# Altium PCB SyringeDriverHW10.PcbDoc
Units mil, origin at the board's own origin, x right, y up, seen from the top; angles counter-clockwise.
Board outline 3780 x 1713 mil, 2 copper layers (Top Layer, Bottom Layer); 55 components, 52 nets, 198 pads, 135 vias.
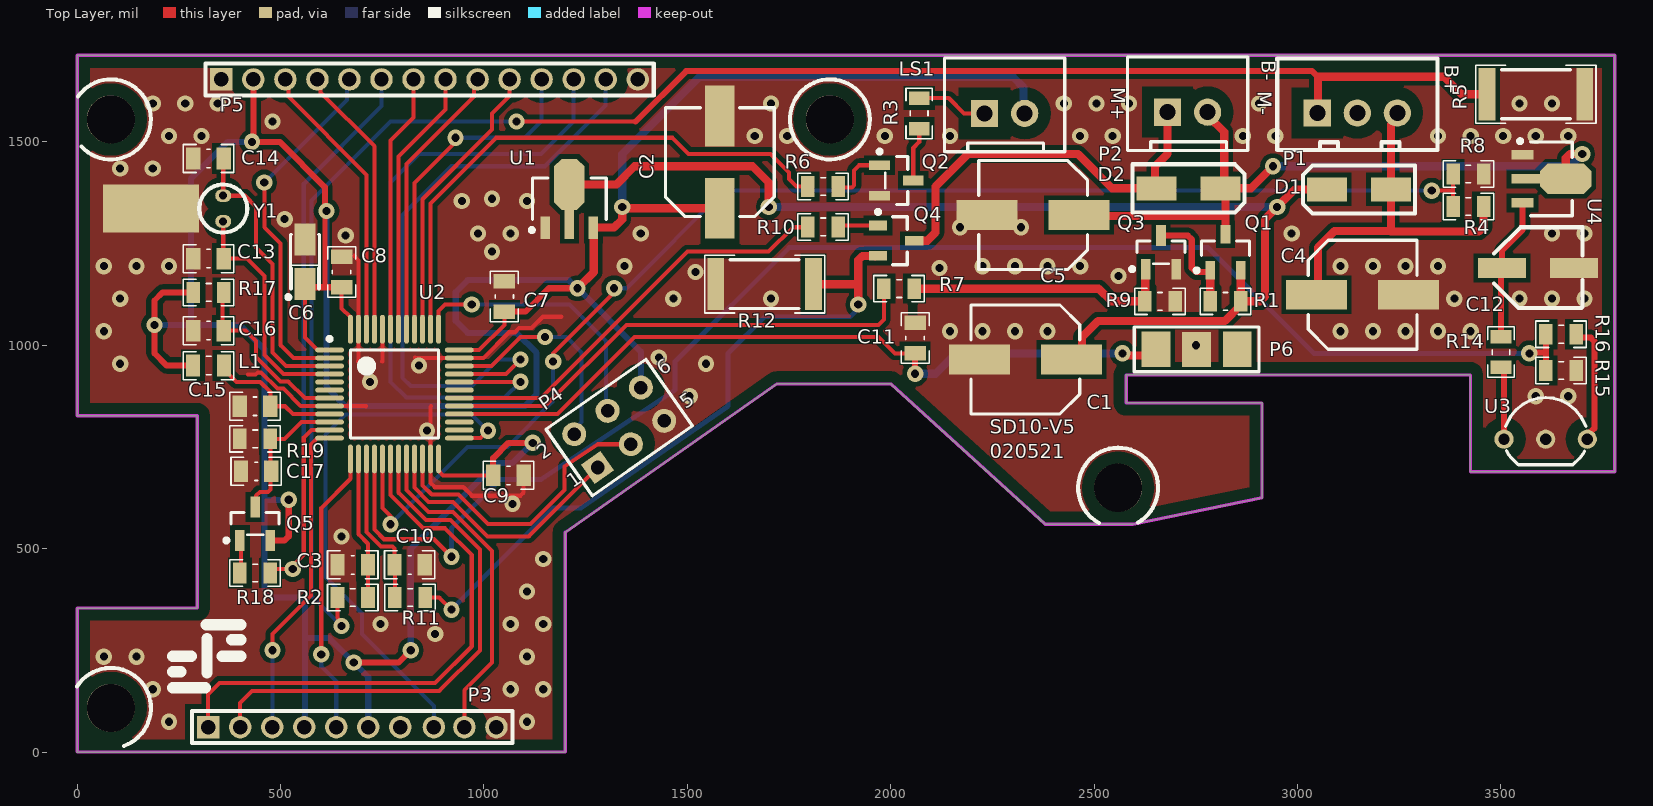
[diagram p0: Top Layer view]
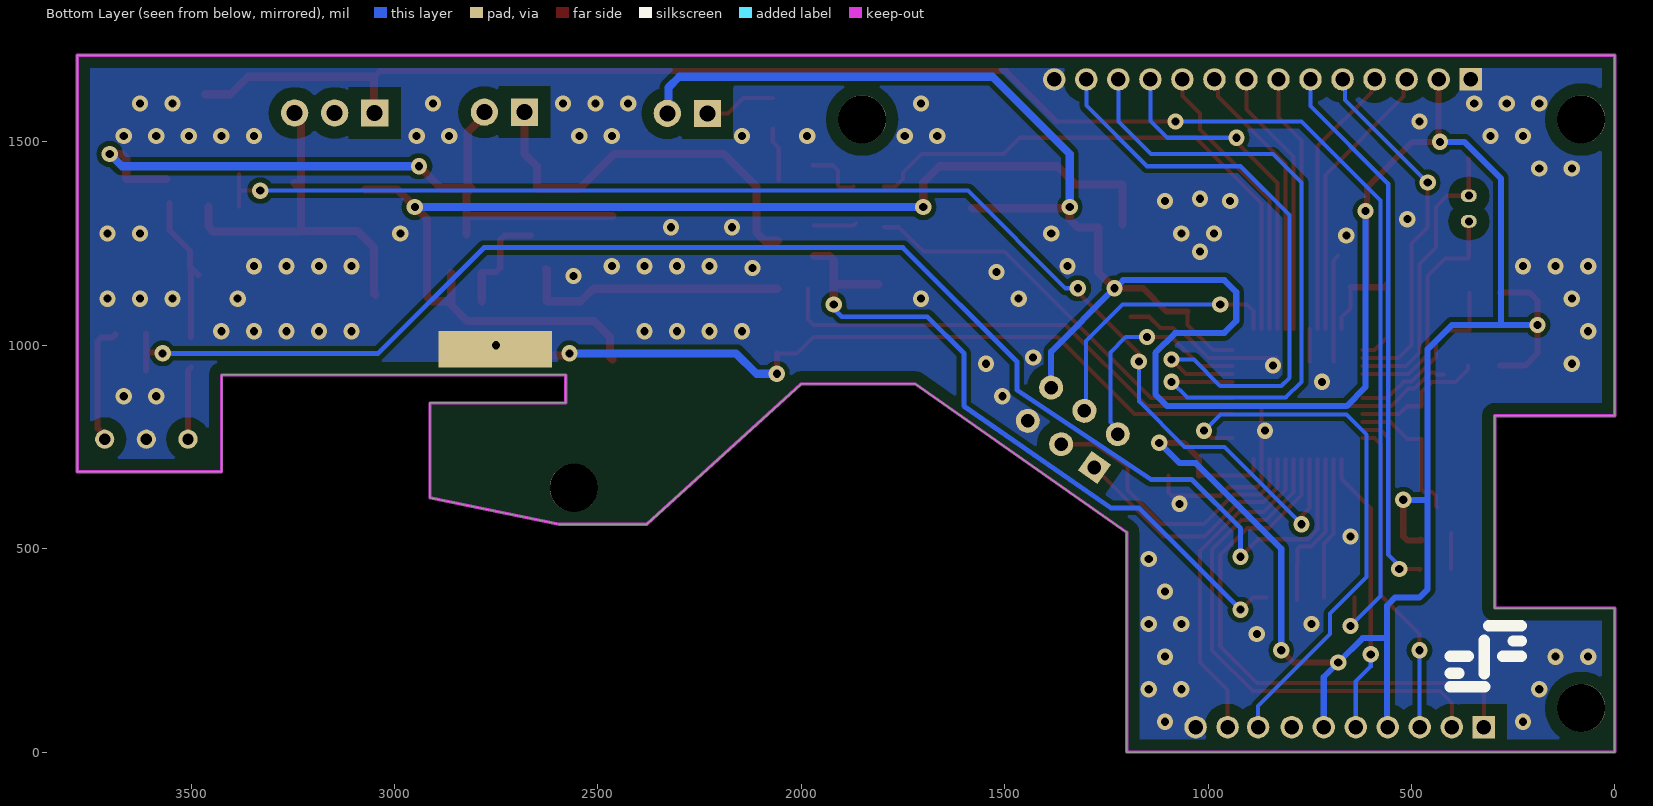
[diagram p1: Bottom Layer view, seen from below]
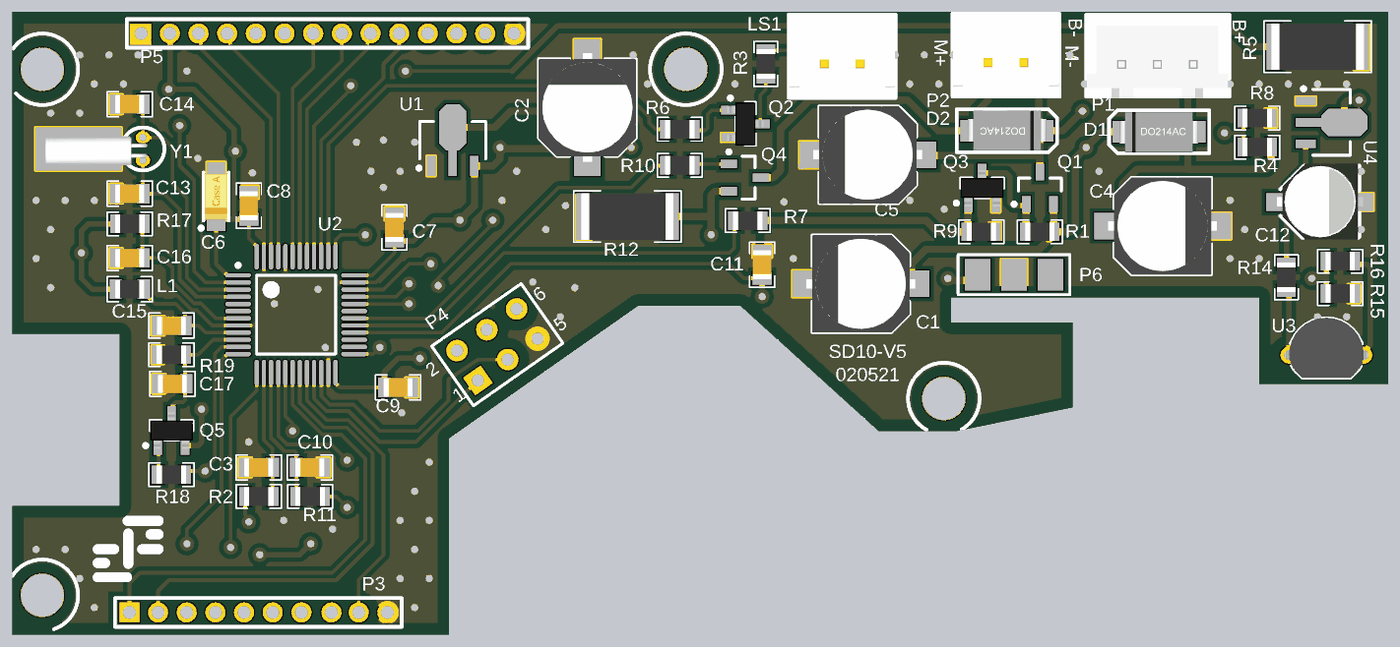
[diagram p2: 3D render of the assembled board from above, using the file's embedded part models]

## Layer stack, top to bottom
Top Solder: solder mask 0.4, Solder Resist, Dk 3.5
Top Layer: signal copper 1.4
Dielectric 1: dielectric 12.6, FR-4, Dk 4.8
Bottom Layer: signal copper 1.4
Bottom Solder: solder mask 0.4, Solder Resist, Dk 3.5

## Board outline
0,354 295.28,354 295.28,826.77 0,826.77 0,1713 3780,1713 3780,689 3425,689 3425,927.17 2579,927.17 2579,858 2913,858 2913,625 2595,560 2380,560 2000,905 1720,905 1200,540 1200,0 0,0

## Design rules (kind name [scope] priority, off if disabled: settings)
BoardOutlineClearance [All] p1: gap=31.5 ignorepadtopadclearanceinfootprint=FALSE
Clearance [All] p1: gap=12 ignorepadtopadclearanceinfootprint=TRUE except(8: Arc-Arc Arc-Track Arc-SMDPad Track-Track Track-SMDPad; 10: Arc-THPad Track-THPad THPad-THPad; 30: THPad-Fill THPad-Poly THPad-Region)
HoleSize [All] p1: absolutevalues=TRUE maxlimit=500 minlimit=1 maxpercent=80.000 minpercent=20.000
PolygonConnect [All] p1: connectstyle=Direct reliefconductorwidth=10 reliefentries=4 polygonreliefangle="90 Angle" airgapwidth=10
RoutingVias [All] p1: holewidth=20 width=40 viastyle="Through Hole" minholewidth=20 minwidth=40 maxholewidth=28 maxwidth=50
SolderMaskExpansion [All] p1: expansion=4 istentingtop=FALSE
Width [All] p1: maxlimit=20 minlimit=10 preferedwidth=10 minimp=50.000000 maximp=50.000000 favimp=50.000000
29 further rules are at their usual default settings.

## Components (designator, comment, footprint, x,y, rotation, side; value= is the part's Value field where it differs from the comment)
C1 "100uF" CAP_EL_SMD_6.3X5.4 2331,965 r180 top
C2 "100uF" CAP_EL_SMD_6.3X5.4 1580,1450 r90 top
C3 "100nF" CAP0805 677.4,460 r0 top
C4 "100uF" CAP_EL_SMD_6.3X5.4 3160,1124 r0 top
C5 "100uF" CAP_EL_SMD_6.3X5.4 2350,1320 r180 top
C6 "10uF" CAP_TANTAL_TYPE_A 465.98,1283.58 r270 top
C7 "100nF" CAP0805 1050,1120 r270 top
C8 "100nF" CAP0805 650,1180 r270 top
C9 "100nF" CAP0805 1060,680 r180 top
C10 "100nF" CAP0805 817.4,460 r180 top
C11 "100nF" CAP0805 2060,1017.4 r270 top
C12 "10uF" CAP_EL_SMD_4X5.3 3591.42,1190 r0 top
C13 "NA" CAP0805 323,1213 r0 top value=10pF
C14 "NA" CAP0805 323,1459 r0 top value=10pF
C15 "100nF" CAP0805 437.4,850 r0 top
C16 "100nF" CAP0805 323,1035.97 r0 top
C17 "100nF" CAP0805 440,690 r180 top
D1 "US1M" DO-241AC 3154,1383 r180 top
D2 "US1M" DO-241AC 2729,1386 r0 top
L1 "Ferrite Bead" IND0805 323,950 r0 top
LS1 "SPK" XH-2PIN 2280,1570 r0 top
P1 "Battery" XH-3PIN 3147,1571 r0 top
P2 "Motor Output" XH-2PIN 2729.79,1573 r0 top
P3 "Header 10" HDR_1X10-2MM 676.27,61.1 r0 top
P4 "Header 3X2" HDR2X3 1279.29,699.29 r35 top
P5 "Header 14" HDR_1X14-2MM 866.14,1653.54 r0 top
P6 "PCB SWITCH" MICROSW_VERTICAL 2752,990 r0 top
Q1 "IRLML6402" Micro3_N 2823,1228.34 r90 top
Q2 "PMBT3904" SOT23_N 2014,1405 r0 top
Q3 "PMBT3904" SOT23_N 2664.4,1228.34 r90 top
Q4 "IRLML2502" SOT-23_N 2013,1257 r0 top
Q5 "PMBT3906" SOT23_N 437.4,561.34 r90 top
R1 "100K" RES0805 2823,1108 r180 top
R2 "470K" RES0805 677.4,380 r180 top
R3 "47R" RES0805 2070,1570 r270 top
R4 "4.7M" RES0805 3420,1341 r180 top
R5 "0R500" RES2512 3586.08,1617 r180 top
R6 "10K" RES0805 1833.84,1390 r180 top
R7 "10K" RES0805 2020.6,1139 r0 top
R8 "1M" RES0805 3420,1421 r0 top
R9 "470K" RES0805 2662,1108 r0 top
R10 "10K" RES0805 1833.84,1291 r0 top
R11 "470K" RES0805 818.4,380 r0 top
R12 "0R500" RES2512 1690,1150 r0 top
R14 "100R" RES0805 3500,983 r270 top
R15 "100K" RES0805 3648,1027 r0 top
R16 "82K" RES0805 3648,938 r180 top
R17 "10K" RES0805 323,1130 r180 top
R18 "220R" RES0805 437.4,440 r180 top
R19 "10k" RES0805 437.4,770 r0 top
U1 "HT7533-3" SOT89N 1210,1360 r90 top
U2 "STM32F103C8T6" LQFP48_N 780,880 r0 top
U3 "UGN3503/AN503" "TO-92 BENT" 3610,769 r0 top
U4 "HT7550-2" SOT89N 3624,1409 r0 top
Y1 "NA" CRYSTAL_NC308-RA 359,1336 r270 top value=32.768kHz

## Footprints (in the part's own frame and the unit in brackets; to place one, negate y for a bottom-side part, rotate by r counter-clockwise, add the part's x,y. Pads: shape width x height; smd on the part's side, far side on the other; paste and mask are expansions set on the pad)
CAP0805 [mm] "Chip Capacitor, 2-Leads, Body 2/00x1/25mm, IPC Medium Density DESIGNER:ABBAS BASEREH"
  rect 0.9x1.35 smd: 1(-0.95,0) 2(0.95,0)
  silkscreen extent -1.58,-0.87 1.58,0.88, body extent -1.03,-0.65 1.02,0.65, height 0.5
CAP_EL_SMD_4X5.3 [mm]
  rect 3x1.25 smd: 1(-2.25,0) 2(2.25,0)
  silkscreen extent -2.74,-2.49 2.77,2.54, body extent -2.96,-2.62 3.04,2.68, height 6.42
CAP_EL_SMD_6.3X5.4 [mm] "Aluminum Electrolytic Capacitor, Body 6.60x6.60x5.80mm, IPC Low Density"
  rect 3.8x1.85 smd: 1(-2.875,0) 2(2.875,0)
  silkscreen extent -3.4,-3.4 3.4,3.4, body extent -3.8,-3.4 3.8,3.4, height 6.36
CAP_TANTAL_TYPE_A [mm]
  rect 2x1.3 smd: 1(3.393,2.388) 2(0.593,2.388)
  silkscreen extent 0.29,1.22 4.32,3.29, body extent 0.41,1.59 3.61,3.19, height 1.6
CRYSTAL_NC308-RA [mm] "32.768khz N308 Right angle"
  oval 0.8x1 hole 0.5: 1(0.8,0) 2(-0.8,0)
  rect 3x6 smd: 3(0,-4.5)
  silkscreen extent -1.5,-1.5 1.5,1.5, body extent -0.87,-6.81 1.13,0.33, height 2.2
DO-241AC [mm]
  rect 2.5x1.5 smd: 1(-1.918,-0.005) 2(2.082,-0.005)
  silkscreen extent -3.42,-1.5 3.58,1.5, body extent -2.64,-1.37 2.84,1.42, height 2.39
HDR2X3 [mm] "Connector; Header; 3x2 Position"
  rect 1.5x1.5 hole 0.85: 1(0,0)
  round 1.5 hole 0.85: 2(0,2.54) 3(2.54,0) 4(2.54,2.54) 5(5.08,0) 6(5.08,2.54)
  silkscreen extent -1.27,-1.27 6.35,3.81
HDR_1X10-2MM [mm]
  rect 1.4x1.4 hole 0.9: 1(-9,0)
  round 1.4 hole 0.9: 2(-7,0) 3(-5,0) 4(-3,0) 5(-1,0) 6(1,0) 7(3,0) 8(5.097,0) 9(7,0)
  round 1.4 hole 0.9 mask+0.102: 10(9,0)
  silkscreen extent -10,-1 10,1
HDR_1X14-2MM [mm]
  rect 1.4x1.4 hole 0.9: 1(-13,0)
  round 1.4 hole 0.9: 2(-11,0) 3(-9,0) 4(-7,0) 5(-5,0) 6(-3,0) 7(-1,0) 8(1,0) 9(3,0) 10(5,0) 11(7,0) 12(9,0) 13(11,0) 14(13,0)
  silkscreen extent -14,-1 14,1
IND0805 [mm] "Chip Inductor, 2-Leads, Body 2/00x1/25mm, IPC Medium Density DESIGNER:ABBAS BASEREH"
  rect 0.87x1.37 smd: 1(-0.97,0) 2(0.97,0)
  silkscreen extent -1.57,-0.87 1.58,0.87, body extent -1.02,-0.65 1.03,0.65, height 0.5
LQFP48_N [mm] "Thin QFP, 48-Leads, Body 7x7mm, Pitch 0.5mm, IPC Medium Density"
  oval 1.8x0.3 smd: 1(-4.05,2.75) 2(-4.05,2.25) 3(-4.05,1.75) 4(-4.05,1.25) 5(-4.05,0.75) 6(-4.05,0.25) 7(-4.05,-0.25) 8(-4.05,-0.75) 9(-4.05,-1.25) 10(-4.05,-1.75) 11(-4.05,-2.25) 12(-4.05,-2.75) 25(4.05,-2.75) 26(4.05,-2.25) 27(4.05,-1.75) 28(4.05,-1.25) 29(4.05,-0.75) 30(4.05,-0.25) 31(4.05,0.25) 32(4.05,0.75) 33(4.05,1.25) 34(4.05,1.75) 35(4.05,2.25) 36(4.05,2.75)
  oval 0.3x1.8 smd: 13(-2.75,-4.05) 14(-2.25,-4.05) 15(-1.75,-4.05) 16(-1.25,-4.05) 17(-0.75,-4.05) 18(-0.25,-4.05) 19(0.25,-4.05) 20(0.75,-4.05) 21(1.25,-4.05) 22(1.75,-4.05) 23(2.25,-4.05) 24(2.75,-4.05) 37(2.75,4.05) 38(2.25,4.05) 39(1.75,4.05) 40(1.25,4.05) 41(0.75,4.05) 42(0.25,4.05) 43(-0.25,4.05) 44(-0.75,4.05) 45(-1.25,4.05) 46(-1.75,4.05) 47(-2.25,4.05) 48(-2.75,4.05)
  silkscreen extent -4.17,-2.75 2.75,3.57, body extent -3.5,-3.5 3.5,3.5, height 1.6
Micro3_N [mm] "SOT23, 3-Leads, Body 2.9x1.3mm, Pitch 0.95mm, Lead Span 2.3mm, IPC Medium Density"
  rect 1.15x0.6 smd: 1(-1.125,0.95) 2(-1.125,-0.95) 3(1.125,0)
  silkscreen extent -1.25,-1.5 0.7,1.92, body extent -0.7,-1.5 0.7,1.5, height 1.12
MICROSW_VERTICAL [mm] "Vertical micro switch"
  rect 1.8x2.2 smd: 1(2.54,0) 2(0,-0.007) 3(-2.54,0)
  rect 7.1x2.3 smd far side: 4(0,0)
  silkscreen extent -3.9,-1.4 3.9,1.4
RES0805 [mm] "Chip Resistor, 2-Leads, Body 2/00x1/25mm, IPC Medium Density DESIGNER:ABBAS BASEREH"
  rect 0.85x1.3 smd: 1(-0.95,0) 2(0.95,0)
  silkscreen extent -1.58,-0.82 1.58,0.82, body extent -1.02,-0.65 1.02,0.65, height 0.5
RES2512 [mm] "Chip Resistor, 2-Leads, Body 6/40x3/20mm, IPC Medium Density DESIGNER:ABBAS BASEREH"
  rect 1.05x3.25 smd: 1(-3.05,0) 2(3.05,0)
  silkscreen extent -3.75,-1.8 3.75,1.8, body extent -3.22,-1.63 3.22,1.63, height 0.7
SOT23_N [mm] "SOT23, 3-Leads, Body 2.9x1.3mm, Pitch 0.95mm, Lead Span 2.3mm, IPC Medium Density"
  rect 1.3x0.6 smd: 1(-1.05,0.95) 2(-1.05,-0.95) 3(1.05,0)
  silkscreen extent -1.17,-1.5 0.7,1.92, body extent -1.27,-1.5 1.27,1.5, height 1.1
SOT89N [mm] "SOT89, 3-Leads, Body 4.5x2.4 mm, Pitch 1.5mm, Lead Span 4.1mm, IPC Medium Density"
  rect 1.4x0.6 smd: 1(-1.8,1.5) 3(-1.8,-1.5)
  rect 1.8x0.6 smd: 2(-1.6,0)
  oct 3.2x1.9 smd: 2(0.9,0)
  silkscreen extent -2.07,-2.3 1.3,2.47, body extent -1.3,-2.3 1.3,2.3, height 1.6
SOT-23_N [mm] "SOT23, 3-Leads, Body 2.9x1.3mm, Pitch 0.95mm, Lead Span 2.3mm, IPC Medium Density"
  rect 1.15x0.6 smd: 1(-1.125,0.95) 2(-1.125,-0.95) 3(1.125,0)
  silkscreen extent -1.25,-1.5 0.7,1.92, body extent -0.7,-1.5 0.7,1.5, height 1.11
"TO-92 BENT" [mm] "DESIGNER :ABBAS BASEREH"
  round 1.2 hole 0.7: 1(-2.6,0) 2(0,0) 3(2.6,0)
  silkscreen extent -2.51,-1.6 2.51,2.6, body extent -2.79,-1.59 2.79,2.61, height 10
XH-2PIN [mm]
  rect 1.7x1.7 hole 1: 1(-1.25,0)
  round 1.7 hole 1: 2(1.25,0)
  silkscreen extent -3.75,-2.4 3.75,3.45, body extent -3.7,-2.35 3.7,3.4, height 7
XH-3PIN [mm]
  rect 1.7x1.7 hole 1: 1(-2.5,0)
  round 1.7 hole 1: 2(0,0) 3(2.5,0)
  silkscreen extent -5,-2.31 5,3.4, body extent -4.98,-2.42 4.92,3.33, height 7

## Part data
C1 C4 C5: library part Cap2, "Electrolyte 16V", PackageDescription="Capacitor; 2 Leads", PackageReference=CAPR5-4X5, Published=23-Sep-2002, Publisher="Altium Limited"
C2: library part Cap2, "Electrolyte  16V", PackageDescription="Capacitor; 2 Leads", PackageReference=CAPR5-4X5, Published=23-Sep-2002, Publisher="Altium Limited"
C3 C7 C8 C9 C10 C11 C13 C14 C15 C16 C17: library part Cap, "Capacitor", LatestRevisionDate=17-Jul-2002, LatestRevisionNote="Re-released for DXP Platform.", PackageDescription="Radial Cap, Thru-Hole; 2 Leads; 0.3 in Pin Spacing", PackageReference=RAD-0.3, Published=8-Jun-2000, Publisher="Altium Limited"
C6: library part Cap2, "tantal 10V", PackageDescription="Capacitor; 2 Leads", PackageReference=CAPR5-4X5, Published=23-Sep-2002, Publisher="Altium Limited"
C12: library part Cap2, "Electrolyte 10V", PackageDescription="Capacitor; 2 Leads", PackageReference=CAPR5-4X5, Published=23-Sep-2002, Publisher="Altium Limited"
D1 D2: library part "Diode 1N4001", "1 Amp General Purpose Rectifier", Code_JEDEC=DO-204-AL, ComponentLink1Description="Manufacturer Link", ComponentLink1URL=http://www.fairchildsemi.com/, ComponentLink2Description=Datasheet, ComponentLink2URL=http://www.fairchildsemi.com/ds/1N%2F1N4001.pdf, DatasheetVersion=1998, LatestRevisionDate=17-Jul-2002, LatestRevisionNote="Re-released for DXP Platform.", PackageDescription="Diode, Axial; Body 5.2 x 2.7 mm (LxDia. max), Lead Dia. 0.86 mm (max)", PackageReference=DO-41, PackageVersion=Aug-1999, Published=8-Jun-2000, Publisher="Altium Limited"
L1: library part Inductor, Code_IEC=1005, Code_JEITA=0402, LatestRevisionDate=29-May-2009, LatestRevisionNote="IPC-7351 Footprint Added.", PackageDescription="Chip Inductor", PackageReference=0402-A, Published=8-Jun-2000, Publisher="Altium Limited"
LS1: library part Buzzer, "Magnetic Transducer Buzzer", ComponentLink1Description="Manufacturer Link", ComponentLink1URL=http://www.megastar.com/linecard/buzzmode/index.php, DatasheetVersion=17-Dec-2003, LatestRevisionDate=17-Dec-2003, LatestRevisionNote="Schematic revised, PCB Footprint replaced.", PackageDescription="Magnetic Transducer Buzzer", PackageReference=ABSM-1574, Published=24-Mar-1999, Publisher="Altium Limited"
P1: library part "Header 3", "Header, 3-Pin", LatestRevisionDate=17-Jul-2002, LatestRevisionNote="Re-released for DXP Platform.", Publisher="Altium Limited"
P2: library part "Header 2", "Header, 2-Pin", LatestRevisionDate=17-Jul-2002, LatestRevisionNote="Re-released for DXP Platform.", Publisher="Altium Limited"
P3: "Header, 10-Pin", LatestRevisionDate=17-Jul-2002, LatestRevisionNote="Re-released for DXP Platform.", Publisher="Altium Limited"
P4: "Header, 3-Pin, Dual row", LatestRevisionDate=17-Jul-2002, LatestRevisionNote="Re-released for DXP Platform.", Publisher="Altium Limited"
P5: "Header, 14-Pin", LatestRevisionDate=17-Jul-2002, LatestRevisionNote="Re-released for DXP Platform.", Publisher="Altium Limited"
P6: library part "Header 4", "Header, 4-Pin", LatestRevisionDate=17-Jul-2002, LatestRevisionNote="Re-released for DXP Platform.", Publisher="Altium Limited"
Q1: library part IRLML6401, "HEXFET Power MOSFET", ComponentLink1Description="Manufacturer Link", ComponentLink1URL=http://www.irf.com/, ComponentLink2Description=Datasheet, ComponentLink2URL=http://www.irf.com/product-info/datasheets/data/IRLML6401.pdf, DatasheetVersion=2-Jul-2001, PackageDescription="3-Pin SOT-23 Package 0.95 mm Pitch, 2.3 mm Lead Span", PackageReference=Micro3, PackageVersion=Jul-2001, Published=17-Sep-2003, Publisher="Altium Limited"
Q2 Q3: "NPN Switching Transistor", ComponentLink1Description="Manufacturer Link", ComponentLink1URL=http://www.semiconductors.philips.com/, ComponentLink2Description=Datasheet, ComponentLink2URL=http://www.semiconductors.philips.com/acrobat/datasheets/PMBT3904_4.pdf, DatasheetVersion=27-Apr-1999, LatestRevisionDate=12-Dec-2006, LatestRevisionNote="IPC-7351 Footprint Added.", PackageDescription="3-Pin SOT-23 Package 0.95 mm Pitch, 2.3 mm Lead Span", PackageReference=SOT23, PackageVersion=May-1999, Published=17-Sep-2003, Publisher="Altium Limited"
Q4: library part IRLML2402, "HEXFET Power MOSFET", ComponentLink1Description="Manufacturer Link", ComponentLink1URL=http://www.irf.com/, ComponentLink2Description=Datasheet, ComponentLink2URL=http://www.irf.com/product-info/datasheets/data/irlml2402.pdf, DatasheetVersion=Aug-1997, LatestRevisionDate=20-Nov-2009, LatestRevisionNote="IPC-7351 Footprint Added.", PackageDescription="3-Pin SOT-23 Package 0.95 mm Pitch, 2.3 mm Lead Span", PackageReference=SOT-23, Published=8-Jun-2000, Publisher="Altium Limited"
Q5: "PNP Switching Transistor", ComponentLink1Description="Manufacturer Link", ComponentLink1URL=http://www.semiconductors.philips.com/, ComponentLink2Description=Datasheet, ComponentLink2URL=http://www.semiconductors.philips.com/acrobat/datasheets/PMBT3906_4.pdf, DatasheetVersion=27-Apr-1999, LatestRevisionDate=12-Dec-2006, LatestRevisionNote="IPC-7351 Footprint Added.", PackageDescription="3-Pin SOT-23 Package 0.95 mm Pitch, 2.3 mm Lead Span", PackageReference=SOT23, PackageVersion=May-1999, Published=17-Sep-2003, Publisher="Altium Limited"
R1 R2 R3 R4 R5 R6 R7 R8 R9 R10 R11 R12 R14 R15 R16 R17 R18 R19: library part Res1, "Resistor", LatestRevisionDate=17-Jul-2002, LatestRevisionNote="Re-released for DXP Platform.", PackageDescription="Axial Device, Thru-Hole; 2 Leads; 0.3 in Pin Spacing", PackageReference=AXIAL-0.3, Published=8-Jun-2000, Publisher="Altium Limited"
U1: library part HT7530-1, "3.0V 100mA Low Power,  Low Dropout Voltage (LDO) Regulator", Code_IPC=SOT89, ComponentLink1Description="Manufacturer Link", ComponentLink1URL=http://www.holtek.com/, ComponentLink2Description=Datasheet, ComponentLink2URL=http://www.holtek.com/pdf/consumer/75xx_1v150.pdf, DatasheetVersion="rev1.50, Jan-2006", PackageDescription="3-Pin SOT-89 Package 1.5 mm Pitch, 4.1 mm Lead Span", PackageReference=SOT-89, PackageVersion=Jan-2006, Published=30-Mar-2007, Publisher="Altium Limited"
U2: "STM32 ARM-based 32-bit MCU with 64 Kbytes Flash, 48-pin LQFP, Industrial Temperature", ComponentLink1Description="Manufacturer Link", ComponentLink1URL=www.st.com/stm32, ComponentLink2Description=Datasheet, ComponentLink2URL=http://www.st.com/stonline/products/literature/ds/13587.pdf, DatasheetVersion="rev6, Mar-2008", PackageDescription="48-Pin Low-Profile Quad Flat Pack, 7 x 7 mm Body, 0.5 mm Pitch (LQFP48)", PackageReference=LQFP48, PackageVersion=Mar-2008, Published=30-May-2008, Publisher="Altium Limited"
U3: library part UGN3503, "RATIOMETRIC, LINEAR / HALL-EFFECT SENSORS"
U4: library part HT7530-1, "5.0V 100mA Low Power,  Low Dropout Voltage (LDO) Regulator", Code_IPC=SOT89, ComponentLink1Description="Manufacturer Link", ComponentLink1URL=http://www.holtek.com/, ComponentLink2Description=Datasheet, ComponentLink2URL=http://www.holtek.com/pdf/consumer/75xx_1v150.pdf, DatasheetVersion="rev1.50, Jan-2006", PackageDescription="3-Pin SOT-89 Package 1.5 mm Pitch, 4.1 mm Lead Span", PackageReference=SOT-89, PackageVersion=Jan-2006, Published=30-Mar-2007, Publisher="Altium Limited"
Y1: library part XTAL_Crystal_G, "XTAL Crystal", ComponentLink1Description=Datasheet, ComponentLink2Description=Reference, Design Date=2017-1-3, Designer="ABBAS BASEREH", Mounting Technology="Surface Mount\Through-Hole", Status=Unreleased

## Free pads (board coordinates)
  round 118.11 hole 118.11: ""(82.68,108.27) ""(82.68,1555.12) ""(1850.39,1555.12) ""(2559.06,649.61)

## Via types
v1: diameter 40, hole 20, Top Layer to Bottom Layer, tented both sides, 135 vias

## Nets (pads, with @x,y where several pads share a name; then routed paths per layer and width w, separated by ;. In a path a pad name is that pad's centre, name@x,y a point inside that pad or via, vN(x,y) a via of type N, cw(c..) or ccw(c..) an arc to the next point about the centre after c; other vN are vias at no path point)
+3V3: C2.1 C6.1 C7.2 C8.2 C9.2 L1.1 LS1.2 P3.4 P3.6 P4.6 P5.2 Q5.2 R17.2 U1.3 U2.1 U2.24 U2.36 U2.48 | length 9043.2
  Top Layer w10: C6.1 560,1019.29 591.02,988.27 U2.1 ; C8.2 650,1090.71 671.73,1068.98 U2.48 ; U2.24 888.27,691.51 899.78,680 C9.2 ; U2.36 988.27,988.27 1050,1050 C7.2
  Top Layer w12: 608.93,1143.67 v1@608.93,1330
  Top Layer w15: L1.1@281.81,950 220,950 190,980 v1(190,1050) 190,1110 210,1130 R17.2@282.6,1130 ; P5.2 433.07,1503.07 v1(430,1500) 497.85,1500 608.93,1388.93 608.93,1334.07 v1(613,1330) ; Q5.2@477.4,522.6 Q5.2 510,520 520,530 v1(520,620) ; C6.1 567.4,1142.6 610,1142.6 ; 608.93,1143.67 610,1142.6 ; C8.2 610,1142.6 ; v1(680,220) 790,220 v1(820,250) ; C9.2 1022.6,722.6 1060,760 v1(1120,760) ; C7.2 1102.09,1082.6 1159.49,1140 v1(1230,1140)
  Top Layer w20: v1(1230,1140) 1270,1180 1270,1288.19 U1.3 1320,1289.13 1340,1309.13 v1(1340,1340) ; v1@1350,1336.81 C2.1
  Bottom Layer w15: v1(190,1050) 280,1050 ; v1(430,1500) 370,1500 280,1410 280,1050 ; v1(520,620) 460,620 ; P3.4 560,62.94 560,280 ; v1(613,1330) 613,897 659.5,850.5 1100.5,850.5 1129.5,879.5 1129.5,981.36 1080.86,1030 960,1030 960,1030.5 930.5,1060 930.5,1130.5 960,1160 1208.71,1160 1228.71,1140 v1(1230,1140) 1385.76,984.24 P4.6 ; P3.6 715.63,184.37 v1(680,220) 620,280 560,280 ; v1(820,250) 820,500 1030,710 1070,710 v1(1120,760) ; 280,1050 400,1050 460,990 460,620 ; 460,620 460,400 480,380 540,380 560,360 560,280
  Bottom Layer w20: v1(1340,1340) 1340,1470 1530,1660 2300,1660 2326.54,1633.46 2326.54,1572.68 LS1.2 LS1.2@2326.54,1567.32
+5V: C12.1 R14.1 U4.3 | length 379.8
  Top Layer w15: C12.1@3482.42,1172.89 C12.1@3502.42,1192.89 ; R14.1 3500,1187.17 C12.1 3502.83,1232.83 3553.13,1283.13 U4.3
BAT+: C4.1 D1.1 P1.3 R4.1 | length 915.5
  Top Layer w20: C4.1 3050,1127.19 3050,1240 3090.5,1280.5 3229.5,1280.5 ; D1.1@3245.43,1399.11 D1.1 ; P1.3 3245.43,1558.3 3229.5,1542.37 D1.1 ; R4.1 3457.4,1291.72 3445.69,1280 3230,1280 3229.5,1280.5 ; 3229.5,1280.5 D1.1
BAT-: P1.1 R2.2 R5.2 | length 4285.7
  Top Layer w10: R2.2 640,330 650,320 v1(650,310) ; v1(1080,1550) 1373,1550
  Top Layer w15: 1373,1550 1497,1674 3036,1674 3050,1660
  Top Layer w20: P1.1 3050,1572.43 3050,1660 3360,1660 3403,1617 R5.2
  Bottom Layer w10: v1(650,310) 576,384 576,1356 770,1550 v1(1080,1550)
BAT_CUR: C3.2 R2.1 U2.14 | length 350.2
  Top Layer w10: U2.14 691.42,535.35 714.8,511.96 C3.2 R2.1
BAT_VOLT: R4.2 R8.1 U2.17 | length 3273.1
  Top Layer w10: U2.17 750.47,599.53 770,580 v1(770,560) ; v1(1170,960) 1170,980 1320,1130 v1(1320,1140) ; v1(3330,1380) 3380,1380 ; R4.2 R8.1
  Bottom Layer w10: v1(770,560) 960,750 1057.67,750 1170,862.33 v1(1170,960) ; v1(1320,1140) 1350,1140 1590,1380 v1(3330,1380)
BUZZER: R6.2 U2.38 | length 1362.9
  Top Layer w10: U2.38 868.58,1348.58 950,1430 1030,1510 1463,1510 1503,1470 1704.11,1470 1750,1424.11 1750,1408.22 1768.22,1390 R6.2
GND: C1.2 C2.2 C3.1 C4.2 C5.2 C6.2 C7.1 C8.1 C9.1 C10.1 C11.1 C12.2 C13.1 C14.1 C15.1 C16.1 C17.2 P3.10 P4.5 P5.1 P5.14 P6.2 P6.4 Q2.2 Q3.2 R5.1 R8.2 R9.2 R12.1 R16.1 R19.1 U1.1 U2.8 U2.23 U2.35 U2.44 U2.47 U3.2 U4.1 Y1.3 | length 1550.9
  Top Layer w10: 420,928 438.73,928 443.95,933.22 452.23,933.22 492.24,893.21 506.79,893.21 549.53,850.47 U2.8 709.53,850.47 710,850 ; 680,1220 691.42,1208.58 U2.47 691.42,961.42 690,960 ; 750,960 750.47,960.47 U2.44 ; 830,970 831.42,968.58 U2.35 998.58,968.58 1061.88,1031.88 1076.43,1031.88 1086.64,1042.1 1117.1,1042.1 1145,1070 1190,1070 ; 870,850 868.58,848.58 U2.23 868.58,661.42 879.06,650.94 949.06,650.94 970,630 1090,630 1097.4,637.4 C9.1
  other v1: 225.57,74.43 1105.57,74.43 185.57,154.43 1065.57,154.43 1145.57,154.43 65.57,234.43 145.57,234.43 1105.57,234.43 880,290 745.57,314.43 1065.57,314.43 1145.57,314.43 1105.57,394.43 1145.57,474.43 650,530 1070,610 860,790 1505.57,874.43 3585.57,874.43 3665.57,874.43 720,910 840,950 105.57,954.43 1545.57,954.43 1430,970 2750,1000 65.57,1034.43 2145.57,1034.43 2225.57,1034.43 2305.57,1034.43 2385.57,1034.43 3105.57,1034.43 3185.57,1034.43 3265.57,1034.43 3345.57,1034.43 3425.57,1034.43 105.57,1114.43 1465.57,1114.43 1705.57,1114.43 3385.57,1114.43 3545.57,1114.43 3625.57,1114.43 3705.57,1114.43 2560,1170 1520,1180 2120,1190 65.57,1194.43 145.57,1194.43 225.57,1194.43 1345.57,1194.43 2225.57,1194.43 2305.57,1194.43 2385.57,1194.43 2465.57,1194.43 3105.57,1194.43 3185.57,1194.43 3265.57,1194.43 3345.57,1194.43 1020,1230 660,1270 985.57,1274.43 1065.57,1274.43 1385.57,1274.43 2985.57,1274.43 3625.57,1274.43 3705.57,1274.43 2170,1290 2320,1290 510,1310 945.57,1354.43 1105.57,1354.43 1020,1360 105.57,1434.43 185.57,1434.43 225.57,1514.43 305.57,1514.43 1665.57,1514.43 1745.57,1514.43 1985.57,1514.43 2145.57,1514.43 2465.57,1514.43 2545.57,1514.43 2865.57,1514.43 2945.57,1514.43 3345.57,1514.43 3425.57,1514.43 3505.57,1514.43 3585.57,1514.43 3665.57,1514.43 480,1550 185.57,1594.43 265.57,1594.43 345.57,1594.43 1705.57,1594.43 2425.57,1594.43 2505.57,1594.43 2585.57,1594.43 2905.57,1594.43 3545.57,1594.43 3625.57,1594.43
KEY_Power: P5.6 R18.1 U2.11 | length 1786.5
  Top Layer w10: U2.11 575.6,791.42 557,772.82 557,485.12 530,458.12 v1(530,450) v1@510,450 ; v1@510,450 477.4,450 480,447.4 482.6,450 v1@510,450
  Bottom Layer w10: v1(530,450) 530,458.12 557,485.12 557,1397 748,1588 P5.6
KEY_PowerR: C17.1 Q5.3 R19.2 U2.10 | length 357.1
  Top Layer w10: Q5.3 440,605.28 440,630 449.34,639.34 468.95,639.34 474.8,645.2 R19.2 510,770 551.1,811.1 U2.10
KEY_StartStop: P5.5 U2.2 | length 890.4
  Top Layer w10: v1(460,1400) 460,1290 500,1250 500,1000 531.42,968.58 U2.2
  Bottom Layer w10: v1(460,1400) 662.87,1602.87 662.87,1647.12 P5.5
KEY_SyringeType: P5.3 U2.46 | length 696.6
  Top Layer w10: P5.3 519.02,1646.34 519.02,1610.98 711.1,1418.9 U2.46
KEY_Time: P5.4 U2.45 | length 672.2
  Top Layer w10: P5.4 598.6,1645.5 598.6,1621.4 730.79,1489.21 U2.45
LED_ALARM: P5.12 U2.32 | length 1608.9
  Top Layer w10: U2.32 1089.53,909.53 v1(1090,910)
  Bottom Layer w10: v1(1090,910) 1051,871 809,871 770,910 770,1400 840,1470 1140,1470 1220.47,1550.47 P5.12
LED_BAT: P3.8 U2.25 | length 1344.9
  Top Layer w10: U2.25 991.73,771.73 v1(1010,790)
  Bottom Layer w10: P3.8 876.93,113.07 700,290 700,340 610,430 610,780 660,830 969.14,830 1009.14,790 v1(1010,790)
LED_SS: P5.13 U2.33 | length 1563.6
  Top Layer w10: U2.33 1053.96,929.21 1084.75,960 v1@1090,960
  Bottom Layer w10: v1(1090,965) 1035,965 970,900 820,900 800,920 800,1320 920,1440 1150,1440 1299.21,1589.21 P5.13
M+: D2.1 P2.1 Q4.3 | length 979.8
  Top Layer w20: Q4.3 2090,1257 2110,1277 2110,1390 2190,1470 2460,1470 2544.18,1385.82 2646.5,1385.82 2650,1389.32 2650,1440 2680.57,1470.57 P2.1
M-: C5.1 D2.2 P2.2 Q1.3 U4.2 | length 1792.4
  Top Layer w20: C5.1@2464.19,1318 2815,1318 ; P2.2 2779,1565.25 2820,1524.25 2820,1394.83 2823,1391.83 D2.2@2823,1385.82 ; Q1.3 2823,1373.8 D2.2 D2.2@2823,1385.82 ; v1(2940,1440) 2885.82,1385.82 D2.2@2823,1385.82 ; U4.2@3561.01,1409 3659.43,1409 3659.43,1460 3669.43,1470 v1(3700,1470)
  Bottom Layer w20: v1(2940,1440) 3670,1440 v1(3700,1470)
MOT_CUR: C10.2 R11.1 U2.15 | length 391.8
  Top Layer w10: U2.15 711.1,541.12 747.22,505 775,505 780,500 C10.2 781,459 R11.1 R11.1@781,373.97
MOT_N: R10.1 U2.30 | length 1031.3
  Top Layer w10: U2.30 1140.16,870.16 1500,1230 1700,1230 1760,1290 1795.44,1290 R10.1
MOT_P: R7.1 U2.29 | length 1207.7
  Top Layer w10: U2.29 1150.47,850.47 1350,1050 1970,1050 1983.2,1063.2 R7.1
NEAREND: R15.1 R16.2 U2.16 | length 3651.2
  Top Layer w10: U2.16 730.79,546.89 754.67,523 877,523 v1(920,480)
  Top Layer w15: v1(3570,980) 3572.5,982.5 3610.6,982.5 ; R16.2 3610.6,982.5 ; R15.1 3610.6,982.5
  Bottom Layer w12: v1(920,480) 920,550 1040,670 1140,670 1470,890 1470,960 1750,1240 2780,1240 3040,980 v1(3570,980)
NetC13_2: C13.2 U2.4 Y1.1 | length 583.2
  Top Layer w10: Y1.1 359,1214.4 C13.2 417,1213 460,1170 460,976.37 507.15,929.21 U2.4
NetC14_2: C14.2 U2.3 Y1.2 | length 713.4
  Top Layer w10: C14.2 359,1457.6 Y1.2 412.5,1367.5 440,1340 440,1240 480,1200 480,981.82 512.93,948.9 U2.3
NetC15_2: C15.2 L1.2 U2.9 | length 335.3
  Top Layer w10: L1.2 361.19,940.16 391.35,910 450,910 475,885 475,850.2 C15.2 510.79,850 530,830.79 U2.9
NetLS1_1: LS1.1 R3.1 | length 176.3
  Top Layer w10: R3.1 2142.6,1607.4 2180,1570 LS1.1
NetQ1_1: Q1.1 Q3.3 R1.2 | length 270
  Top Layer w15: Q3.3 2730.32,1269.68 2740,1260 2740,1190 2750,1180 2783.31,1180 Q1.1@2785.6,1177.71
  Top Layer w20: R1.2 Q1.1@2785.6,1177.71
NetQ2_1: Q2.1 R6.1 | length 146.9
  Top Layer w10: R6.1 1873.91,1387.33 1904.12,1387.33 1910,1393.22 1910,1430 1922.4,1442.4 Q2.1
NetQ2_3: Q2.3 R3.2 | length 133.7
  Top Layer w10: Q2.3 2055.34,1485.34 2070,1500 R3.2
NetQ3_1: Q3.1 R7.2 R9.1 | length 659.4
  Top Layer w20: R7.2 2511,1139 2542,1108 R9.1 2625.8,1109.2 2625.8,1185.8 Q3.1
NetQ4_1: Q4.1 R10.2 | length 106
  Top Layer w10: R10.2@1865.4,1301 1872,1294.4 Q4.1
NetQ4_2: Q4.2 R11.2 R12.2 | length 1722.6
  Top Layer w10: R11.2 890,380 v1(920,350) ; Q4.2@1961.9,1212.79 Q4.2
  Top Layer w20: R12.2 1920,1150 ; v1(1920,1100) 1920,1150 ; Q4.2 1930.4,1219.6 1920,1209.2 1920,1150
  Bottom Layer w12: v1(920,350) 1170,600 1238.73,600 1600,850 1600,980 1690,1070 1900,1070 v1@1925,1095
NetQ5_1: Q5.1 R18.2 | length 88.7
  Top Layer w10: R18.2@402.6,450 Q5.1@402.6,538.66
NetR14_2: R14.2 U3.1 | length 179.8
  Top Layer w15: R14.2 3507.64,937.96 U3.1
NetR15_2: R15.2 U3.3 | length 299.9
  Top Layer w15: R15.2 3693.61,1018.79 3721.21,1018.79 3730,1010 3730,795.36 3712.36,777.73 U3.3
RESET: C16.2 R17.1 U2.7 | length 448.9
  Top Layer w10: R17.1@357.4,1130 357.4,1035.97 414.03,1035.97 440,1010 440,970.91 499.7,911.21 518.79,911.21 560,870 620.39,870 U2.7
SEG_A: P3.1 U2.18 | length 1351.8
  Top Layer w10: P3.1 321.93,141.93 350,170 880,170 970,260 970,484.14 904.14,550 851.79,550 770.16,631.63 U2.18
SEG_B: P3.2 U2.19 | length 1291.6
  Top Layer w10: P3.2 400.67,120.67 430,150 890,150 990,250 990,498.18 918.18,570 857.25,570 789.84,637.4 U2.19
SEG_C: P3.9 U2.20 | length 810
  Top Layer w10: U2.20 809.53,644.11 863.63,590 923.64,590 1020,493.64 1020,220 951.86,151.86 P3.9
SEG_D: P5.10 U2.39 | length 702.8
  Top Layer w10: U2.39 848.9,1358.9 1020,1530 1020,1570 1062.99,1612.99 P5.10
SEG_DP: P5.7 U2.43 | length 637.5
  Top Layer w10: U2.43 770.16,1503.54 826.77,1560.16 P5.7
SEG_E: P5.11 U2.40 | length 843.1
  Top Layer w10: U2.40 829.21,1399.21 930,1500 v1(930,1510)
  Bottom Layer w10: v1(930,1510) 1100,1510 1141.73,1551.73 P5.11
SEG_F: P5.9 U2.41 | length 686.5
  Top Layer w10: U2.41 809.53,1445.39 975.62,1611.48 975.62,1644.91 P5.9
SEG_G: P5.8 U2.42 | length 662
  Top Layer w10: U2.42 789.84,1463.86 905.51,1579.53 P5.8
SEG_NUM1: P3.5 U2.13 | length 704.4
  Top Layer w10: v1(600,240) 600,600 671.73,671.73 U2.13
  Bottom Layer w10: v1(600,240) 600,210 636.89,173.11 P3.5
SEG_NUM2: P3.3 U2.12 | length 786.4
  Top Layer w10: v1(480,250) 480,290 575,385 575,755.71 591.02,771.73 U2.12
  Bottom Layer w10: P3.3 480,61.68 v1(480,250)
SWCLK: P4.4 U2.37 | length 673.5
  Top Layer w10: U2.37 888.27,1084.4 903.87,1100 v1(970,1100)
  Bottom Layer w10: v1(970,1100) 1210,1100 1300,1010 1300,842.41 P4.4
SWDIO: P4.2 U2.34 | length 554.2
  Top Layer w10: U2.34 1018.9,948.9 1090,1020 v1(1150,1020)
  Bottom Layer w10: v1(1150,1020) 1202.33,1020 1240,982.33 1240,811.59 1221.93,793.52 P4.2
SWITCH_FB: C11.2 P6.3 U2.28 | length 1886.8
  Top Layer w10: U2.28 1180.79,830.79 1370,1020 1970,1020 2010,980 C11.2
  Top Layer w15: v1(2060,930) C11.2
  Top Layer w20: v1(2570,980) 2575.43,974.57 2636.57,974.57 P6.3
  Bottom Layer w20: v1(2060,930) 2110,930 2160,980 v1(2570,980)
USART3_RX: P4.3 U2.22 | length 726.4
  Top Layer w10: U2.22 849.24,720.2 849.24,655.3 871.61,632.94 937.06,632.94 1010,560 1114.54,560 1198.47,643.92 1198.47,702.3 1280,756.65 P4.3
USART3_TX: P4.1 U2.21 | length 640.5
  Top Layer w10: U2.21 829.21,649.88 864.15,614.94 924.16,614.94 1009.1,530 1110,530 P4.1
VIN: C1.1 D1.2 Q1.2 R1.1 U1.2 | length 2935.1
  Top Layer w20: U1.2@1210,1297.01 1210,1395.43 1325.43,1395.43 1370,1440 1660,1440 1700,1400 v1(1700,1340) ; C1.1@2464.19,965 2470,970.81 2470,1020 2510,1060 2821.26,1060 2860.4,1099.14 R1.1 ; Q1.2@2860.4,1177.71 R1.1 ; v1@2955.41,1340 v1(2950,1340) ; D1.2 2993.18,1383.18 v1(2950,1340) ; R1.1 2908.28,1108 2920,1119.72 2920,1310 v1(2950,1340)
  Bottom Layer w20: v1(1700,1340) v1(2950,1340)
pads on no net: P1.2 P3.7 P6.1 U2.5 U2.6 U2.26 U2.27 U2.31

## Polygon pours and split planes (outlines as drawn)
GND on Top Layer "GND_L01_P000" (solid, remove dead copper, pour order 0): 0,354 295.28,354 295.28,807 0,807 0,1713 3780,1713 3780,689 3425,689 3425,925 2579,925 2579,858 2913,858 2913,625 2595,560 2380,560 2000,905 1720,905 1200,540 1200,0 0,0
GND on Bottom Layer "GND_L02_P001" (solid, remove dead copper, pour order 1): 0,354 295.28,354 295.28,807 0,807 0,1713 3780,1713 3780,689 3425,689 3425,925 2579,925 2579,858 2913,858 2913,625 2595,560 2380,560 2000,905 1720,905 1200,540 1200,0 0,0

## Keep-outs
Keep-Out Layer:
  the board outline again, w7.87

## Other copper
Top Layer:

## Silkscreen, mask and mechanical layers (free items; w line width, h text height)
Top Overlay:
  circle w10: c1850.39,1555.12 r98.43
  lines w10: -0.15,161.44 cw(c82.68,108.27) 114.82,15.24 ; 2.3,1611.93 cw(c82.68,1555.12) 10.25,1488.47 ; 2511.79,563.27 cw(c2559.06,649.61) 2607.7,564.04
  lines w28: 235,158 315,158 ; 235,197 255,197 ; 235,235.08 280,235.08 ; 317,313 402,313 ; 319,195 319,278 ; 357,235 402,235 ; 380,276 402,276
  text "B-" at 2900,1700.1 h60 r270
  text "B+" at 3350,1690.1 h60 r270
  text "M+" at 2530,1634.52 h60 r270
  text "M-" at 2890,1624.52 h60 r270
  text "SD10-V5 / 020521" at 2243.47,710 h60
Bottom Overlay:
  lines w28: 230,235 275,235 ; 230,273 250,273 ; 230,310 310,310 ; 320,160 405,160 ; 321,192 321,275 ; 360,234.92 405,234.92 ; 383,194 405,194

## Text inside footprints (layer, text, board x,y; h text height)
P4: Top Overlay "1" at 1225.23,637.02 h60 r35; Top Overlay "2" at 1151.49,707.46 h60 r35; Top Overlay "5" at 1503.74,832.04 h60 r35; Top Overlay "6" at 1446.38,913.95 h60 r35